# Altium PCB Adapter.PcbDoc
Units mm, origin at the board's own origin, x right, y up, seen from the top; angles counter-clockwise.
Board outline 101.6 x 152.4 mm, 2 copper layers (Top Layer, Bottom Layer); 3 components, 0 nets, 6 pads, 0 vias.
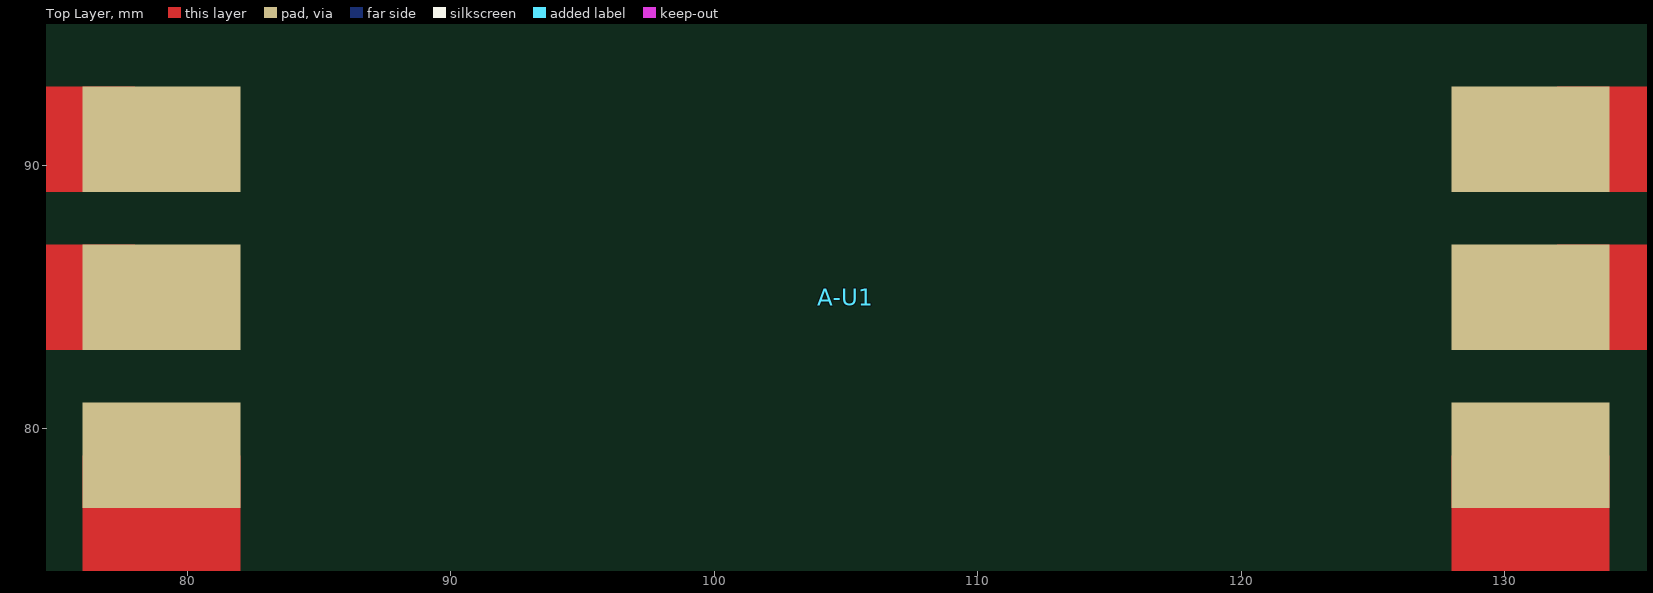
[diagram p0: Top Layer view]
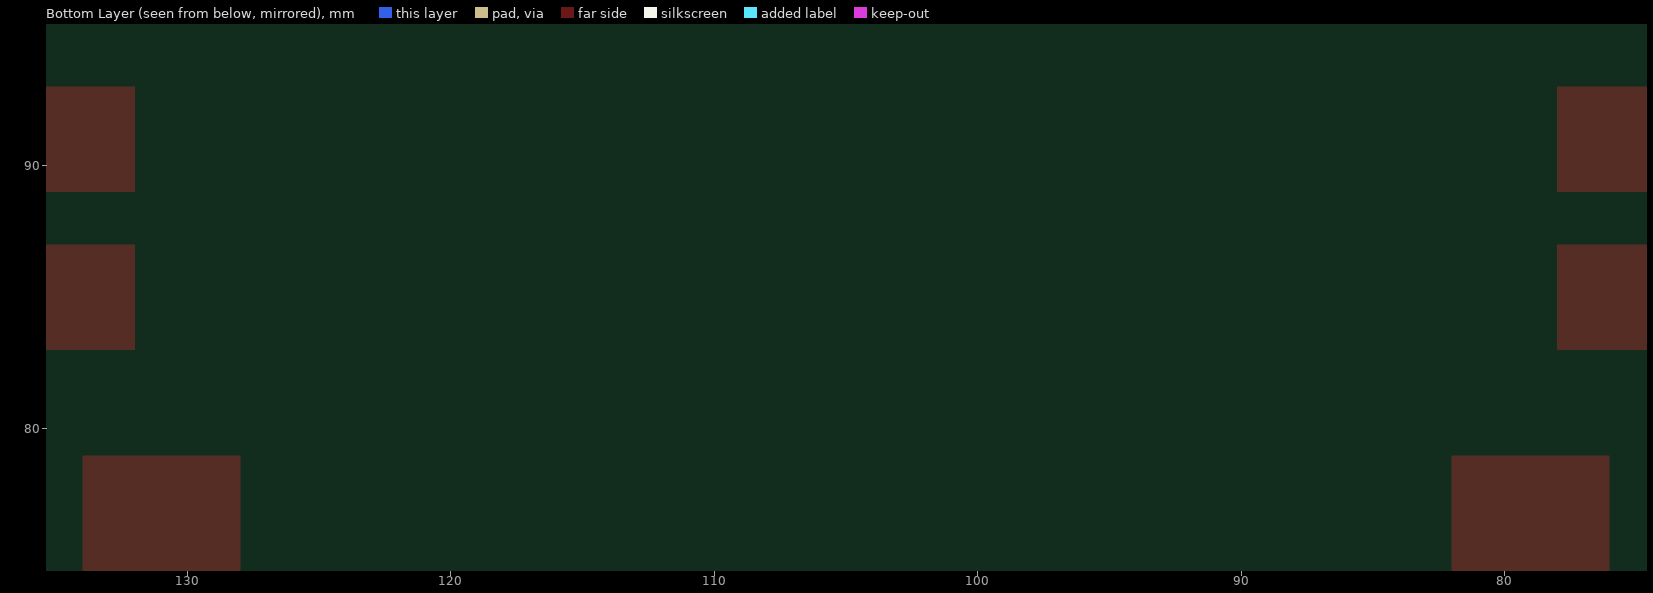
[diagram p1: Bottom Layer view, seen from below]

## Layer stack, top to bottom
Top Solder: solder mask 0.0102, Solder Resist, Dk 3.5
Top Layer: signal copper 0.0356
Dielectric 1: dielectric 0.32, FR-4, Dk 4.8
Bottom Layer: signal copper 0.0356
Bottom Solder: solder mask 0.0102, Solder Resist, Dk 3.5

## Board outline
55.4,159.6 55.4,7.2 157,7.2 157,159.6

## Design rules (kind name [scope] priority, off if disabled: settings)
Clearance [All] p1: gap=0.254
PolygonConnect [All] p1: connectstyle=Relief reliefconductorwidth=0.254 reliefentries=4 polygonreliefangle="90 Angle" airgapwidth=0.254
RoutingVias [All] p1: holewidth=0.711 width=1.27 viastyle="Through Hole" minholewidth=0.711 minwidth=1.27 maxholewidth=0.711 maxwidth=1.27
SolderMaskExpansion [All] p1: expansion=0.102
Width [All] p1: maxlimit=0.254 minlimit=0.254 preferedwidth=0.254
30 further rules are at their usual default settings.

## Components (designator, comment, footprint, x,y, rotation, side; value= is the part's Value field where it differs from the comment)
A-U1 "LED Chip" "LED Chip RGB 100W CUT" 105,85 r0 top
M1 "Screw M3" "Screw M3" 74.5,99 r270 top
M2 "Screw M3" "Screw M3" 135.5,99 r270 top

## Footprints (in the part's own frame and the unit in brackets; to place one, negate y for a bottom-side part, rotate by r counter-clockwise, add the part's x,y. Pads: shape width x height; smd on the part's side, far side on the other; paste and mask are expansions set on the pad)
"LED Chip RGB 100W CUT" [mm]
  rect 6x4 smd: 1(-26,-6) 2(-26,0) 3(-26,6) 4(26,6) 5(26,0) 6(26,-6)
"Screw M3" [mm]
  body extent -6,-6 6,6, height 11.2

## Part data
A-U1: library part "LED Chip RGB 100W"

## Nets (pads, with @x,y where several pads share a name; then routed paths per layer and width w, separated by ;. In a path a pad name is that pad's centre, name@x,y a point inside that pad or via, vN(x,y) a via of type N, cw(c..) or ccw(c..) an arc to the next point about the centre after c; other vN are vias at no path point)
pads on no net: A-U1.1 A-U1.2 A-U1.3 A-U1.4 A-U1.5 A-U1.6

## Other copper
Top Layer:
  region: 129.5,52 123.5,52 123.5,44 129.5,44
  region: 121.5,57 115.5,57 115.5,44 121.5,44
  region: 113.5,62 107.5,62 107.5,44 113.5,44
  region: 134,62 113.5,62 113.5,58.5 134,58.5
  region: 134,79 128,79 128,61.5 134,61.5
  region: 139,57 121.5,57 121.5,54 139,54
  region: 139,87 136,87 136,57 139,57
  region: 136,87 132,87 132,83 136,83
  region: 144.5,52 129.5,52 129.5,49 144.5,49
  region: 144.5,93 141,93 141,52 144.5,52
  region: 141,93 132,93 132,89 141,89
  rectangle: 69,89 78,93
  rectangle: 65.5,52 69,93
  rectangle: 65.5,49 80.5,52
  rectangle: 74,83 78,87
  rectangle: 71,57 74,87
  rectangle: 71,54 88.5,57
  rectangle: 76,61.5 82,79
  rectangle: 76,58.5 96.5,62
  rectangle: 96.5,44 102.5,62
  rectangle: 88.5,44 94.5,57
  rectangle: 80.5,44 86.5,52

## Silkscreen, mask and mechanical layers (free items; w line width, h text height)
Cutting Outside:
  lines w0.254: 144.5,106 144.5,106 ; 144.5,106 126,106 126,63 84,63 84,106 65.5,106 65.5,44 144.5,44 144.5,106